# Altium PCB BUCK.PcbDoc
Units mm, origin at the board's own origin, x right, y up, seen from the top; angles counter-clockwise.
Board outline 127 x 101.6 mm, 4 copper layers (Top Layer, Internal Plane 1, Internal Plane 2, Bottom Layer), stack 0.462 mm thick; 37 components, 24 nets, 93 pads, 0 vias.
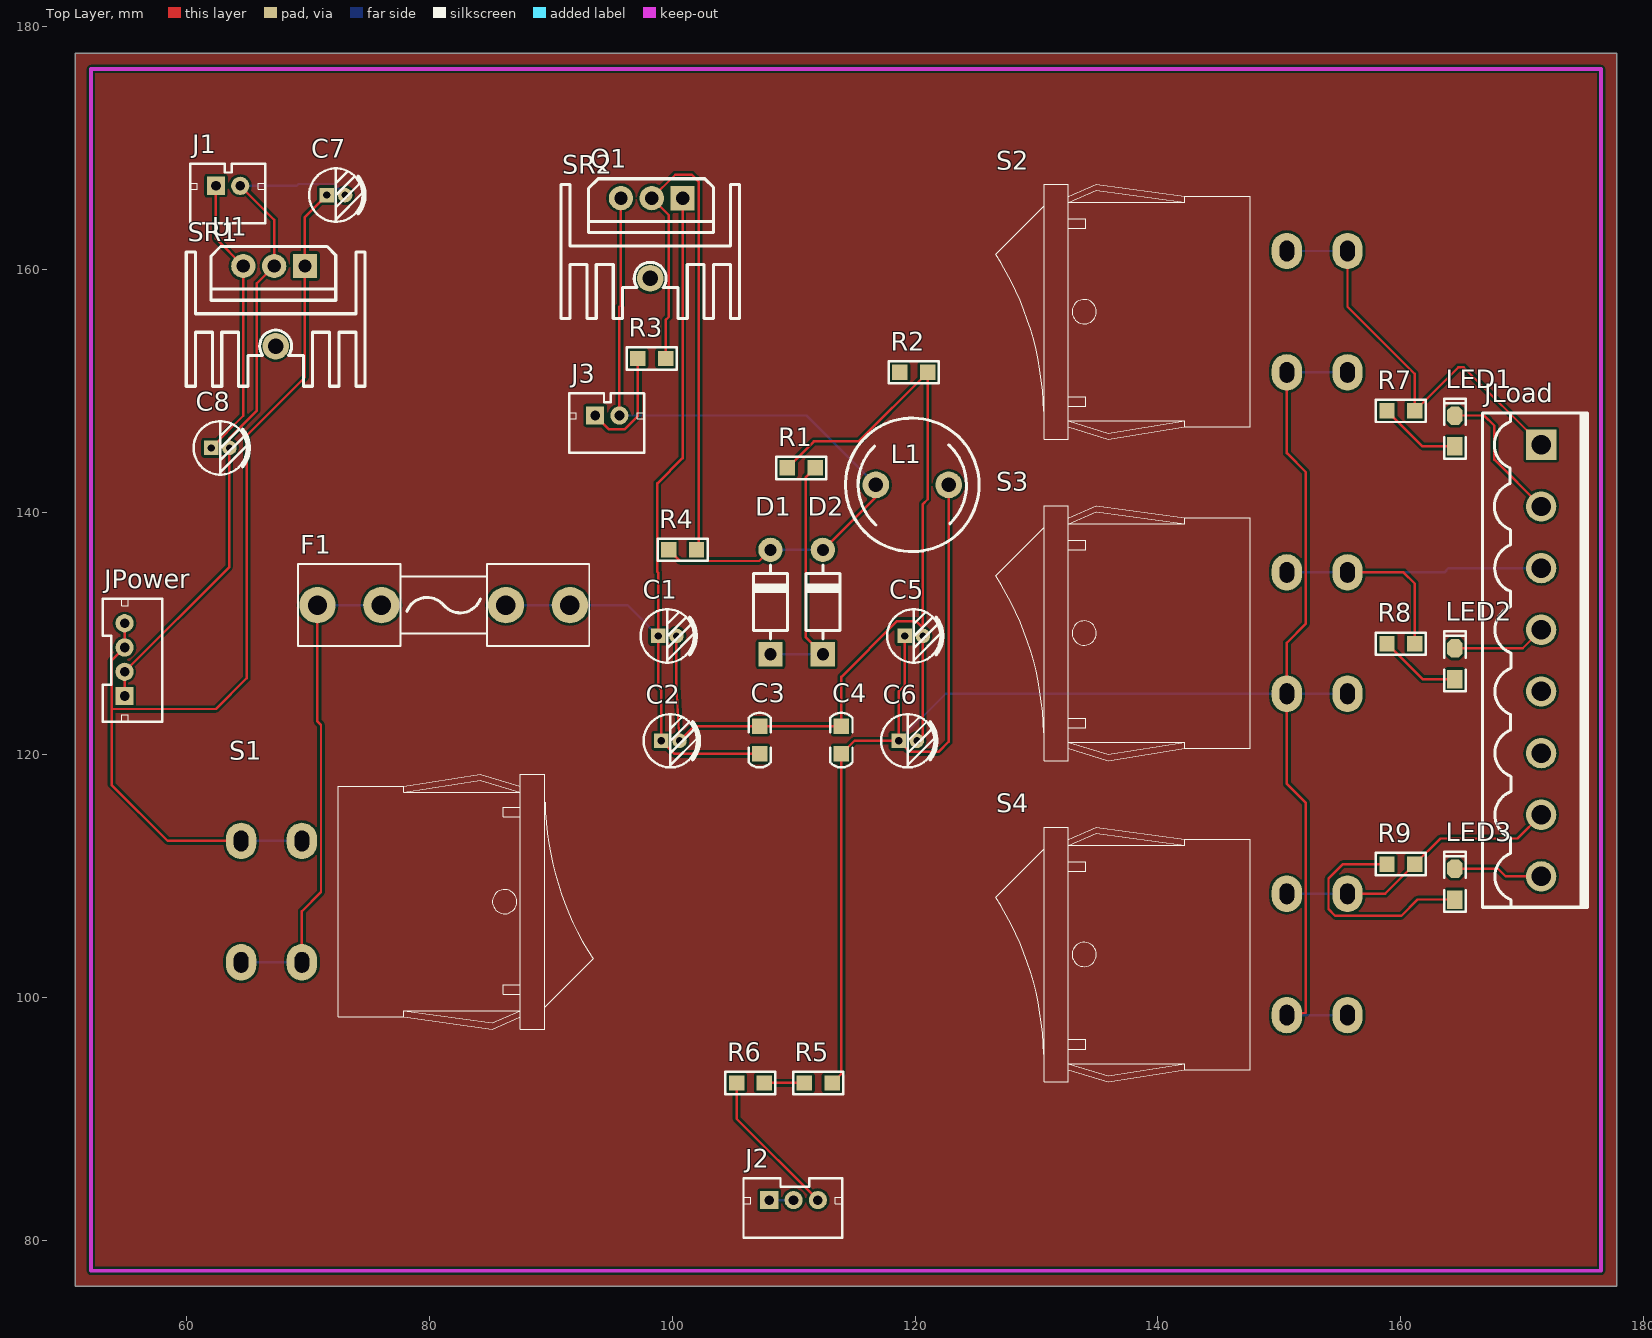
[diagram p0: Top Layer view]
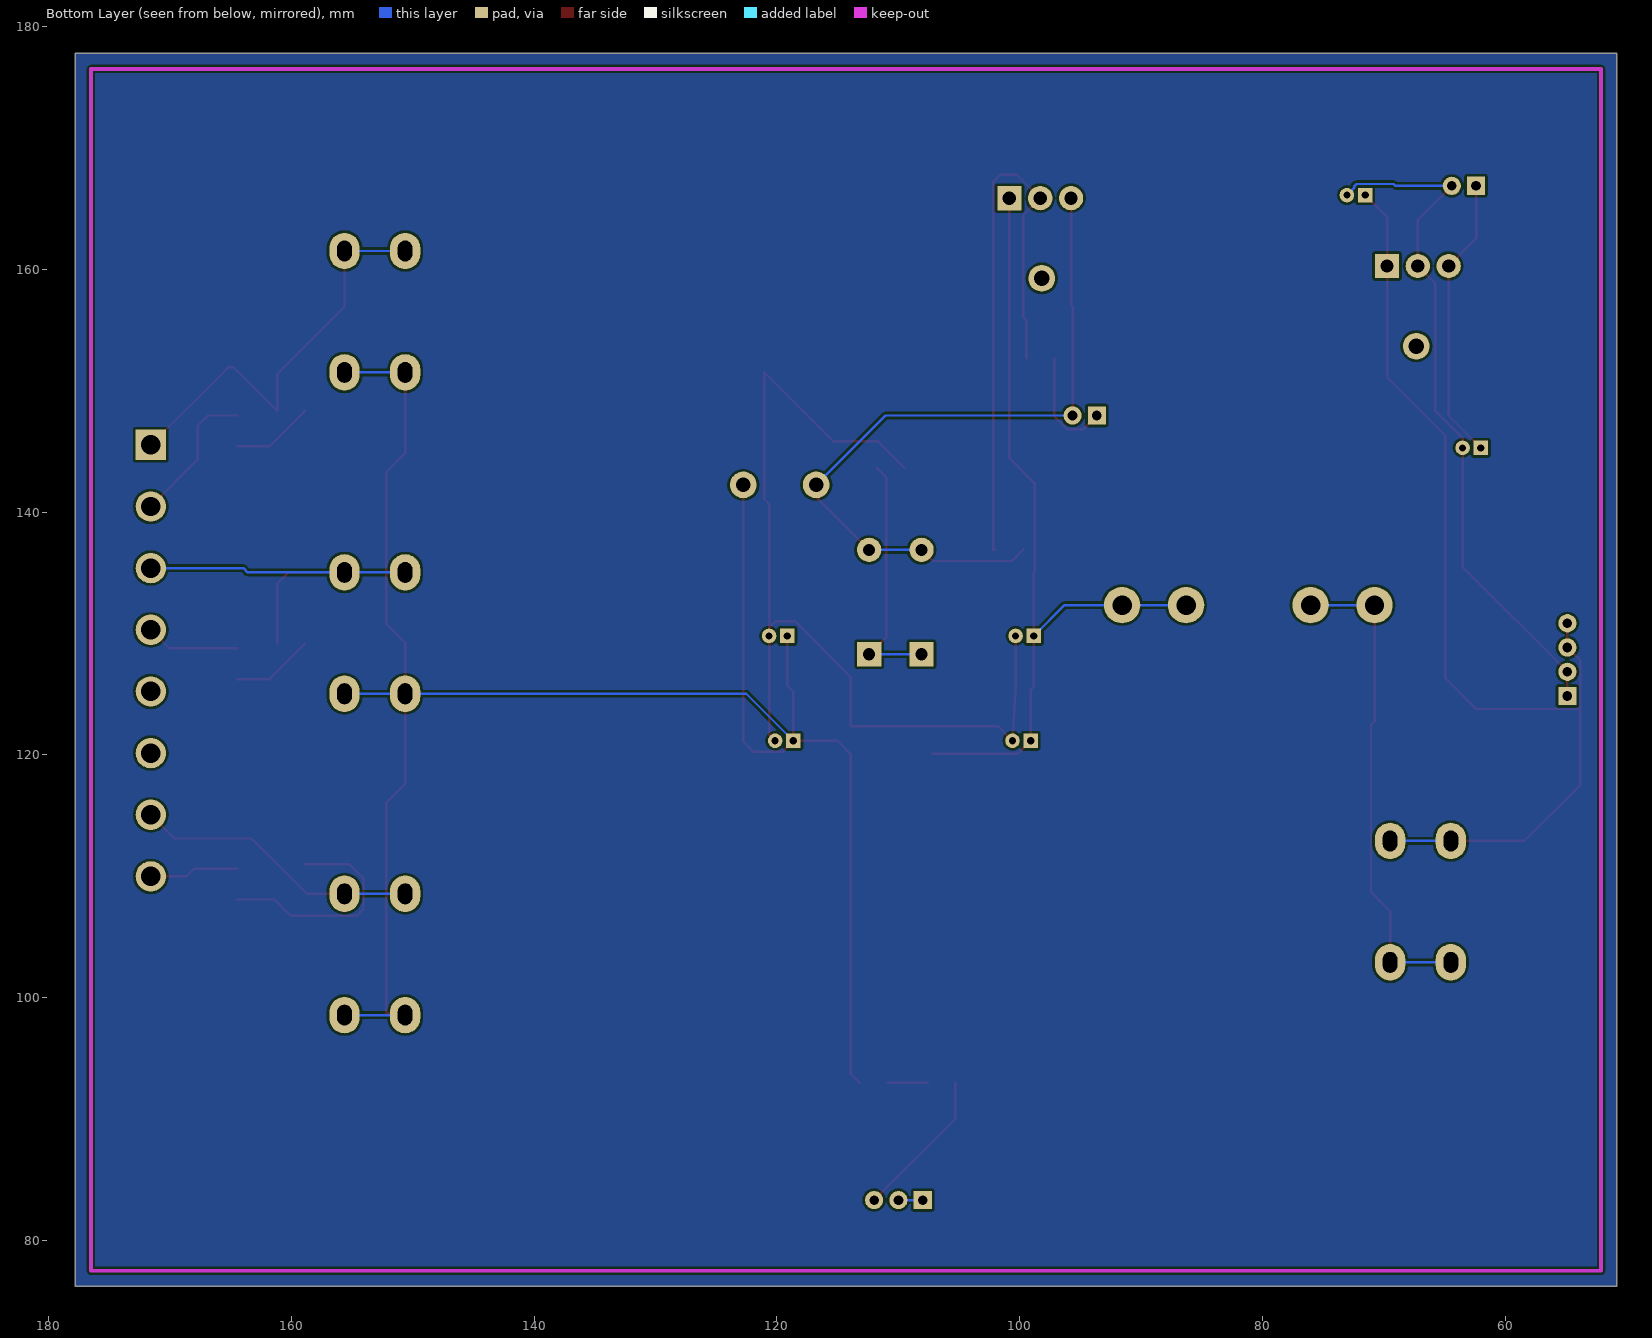
[diagram p1: Bottom Layer view, seen from below]
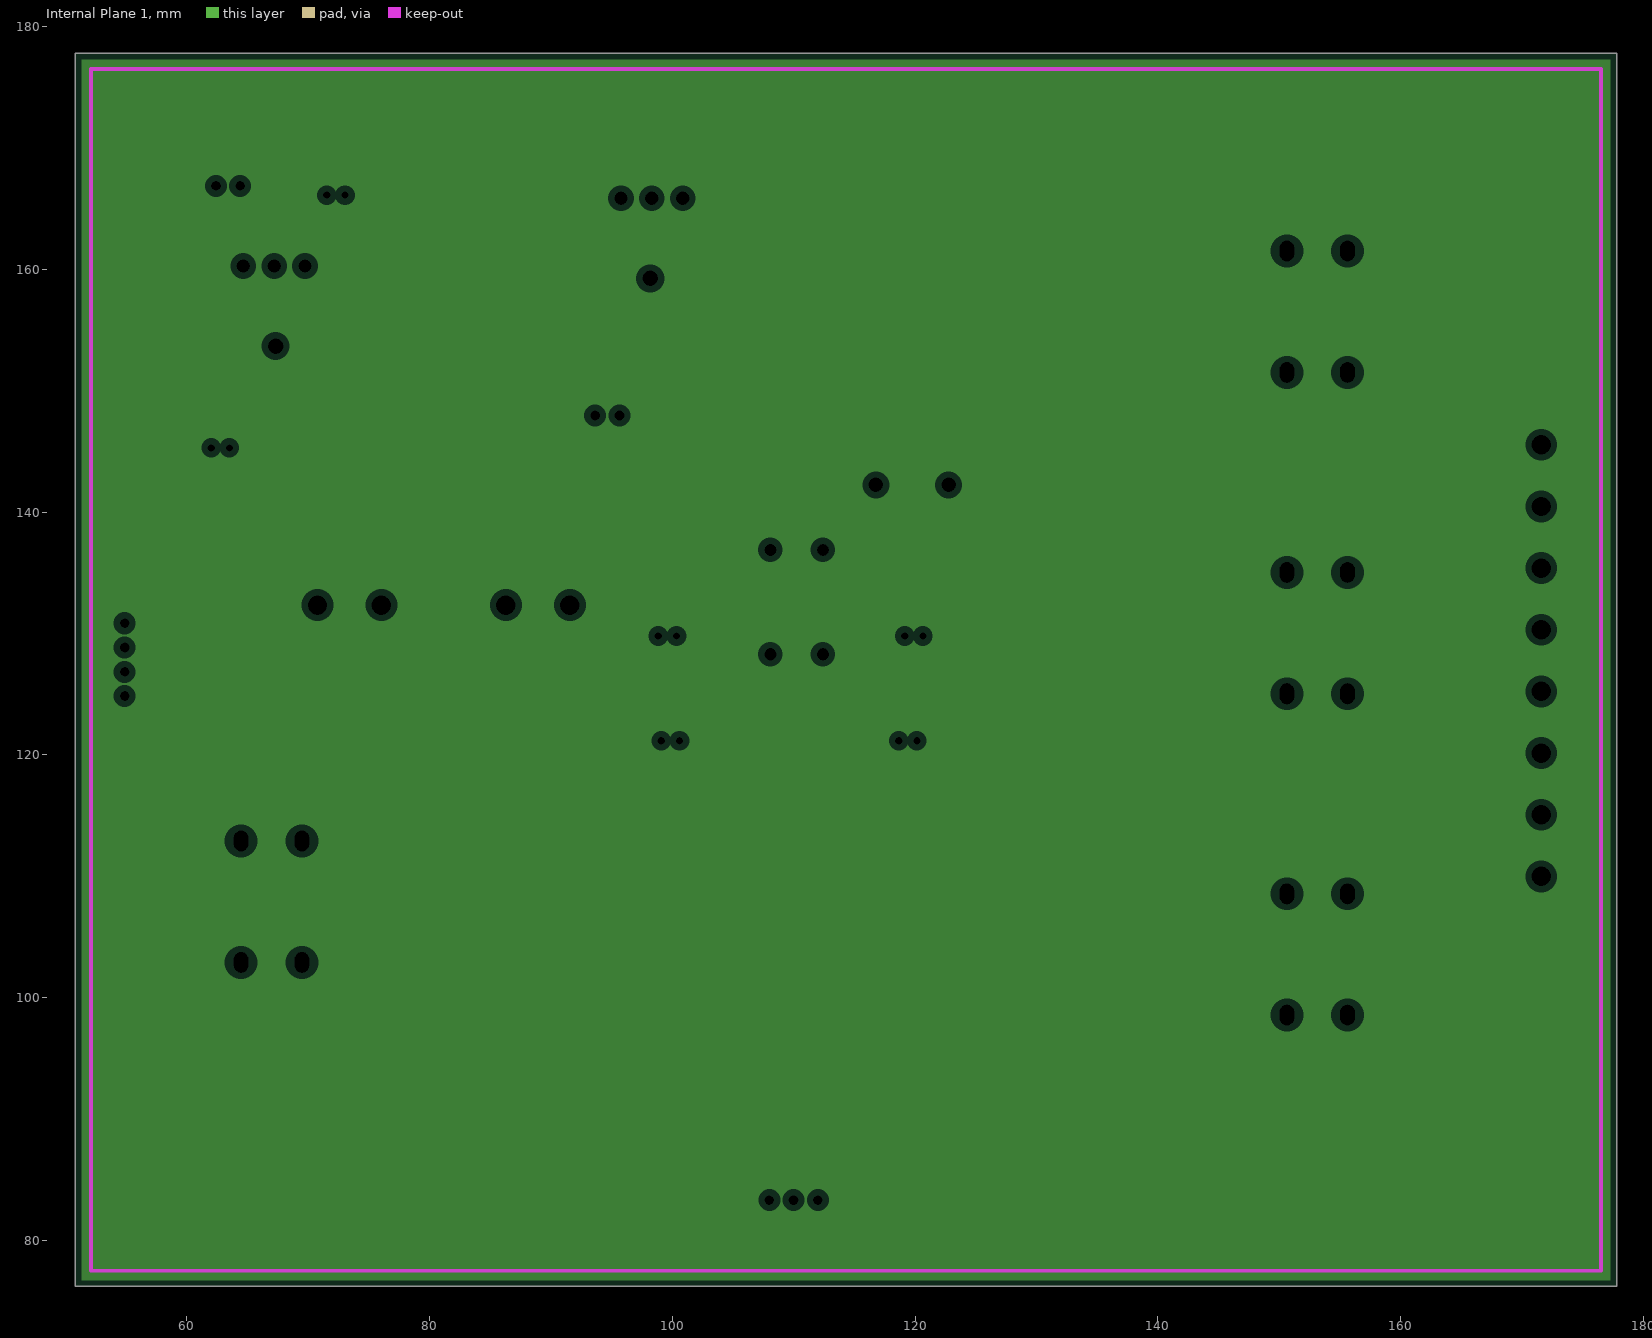
[diagram p2: Internal Plane 1, clearances drawn from the general rule]
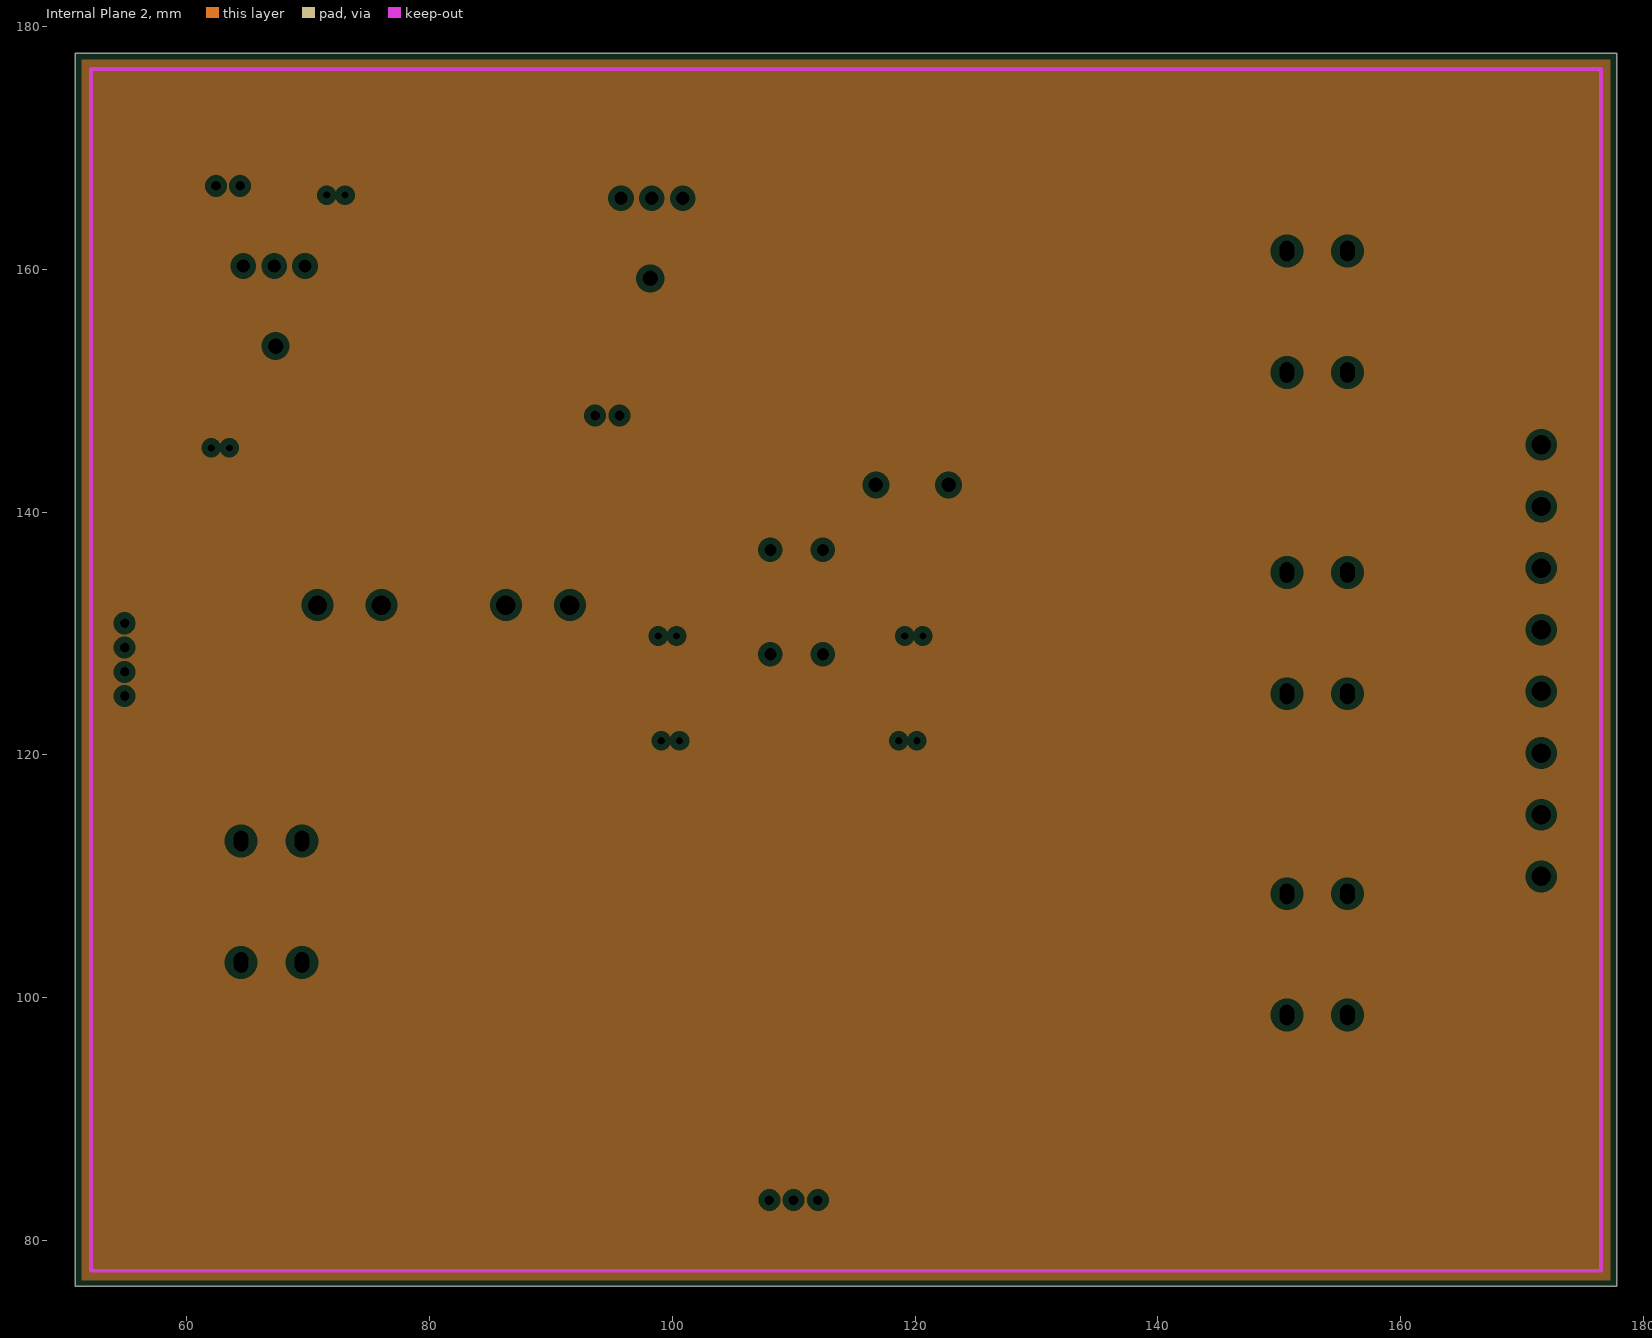
[diagram p3: Internal Plane 2, clearances drawn from the general rule]

## Layer stack, top to bottom
Top Solder: solder mask 0.0102, Solder Resist, Dk 3.5
Top Layer: signal copper 0.0356
Internal Plane 1: plane copper 0.0356
Internal Plane 2: plane copper 0.0356
Dielectric 1: dielectric 0.32, FR-4, Dk 4.8
Bottom Layer: signal copper 0.0356
Bottom Solder: solder mask 0.0102, Solder Resist, Dk 3.5

## Board outline
50.8,76.2 177.8,76.2 177.8,177.8 50.8,177.8

## Design rules (kind name [scope] priority, off if disabled: settings)
Clearance [All] p1: gap=0.2 ignorepadtopadclearanceinfootprint=FALSE
PlaneClearance [All] p1: clearance=0.508
PlaneConnect [All] p1: planeconnectstyle=Relief reliefexpansion=0.508 reliefentries=4 reliefconductorwidth=0.254 reliefairgap=0.254
PolygonConnect [All] p1: connectstyle=Relief reliefconductorwidth=0.254 reliefentries=4 polygonreliefangle="90 Angle" airgapwidth=0.254
RoutingVias [All] p1: holewidth=0.6 width=1 viastyle="Through Hole" minholewidth=0.711 minwidth=1.27 maxholewidth=0.711 maxwidth=1.27
SMDNeckDown [All] p1: percent=50.000
SolderMaskExpansion [All] p1: expansion=0.102
Width [All] p1: maxlimit=0.2 minlimit=0.2 preferedwidth=0.2
28 further rules are at their usual default settings.

## Components (designator, comment, footprint, x,y, rotation, side; value= is the part's Value field where it differs from the comment)
C1 "1000uF/63V" "CAP 1.5*4*8" 99.58,129.794 r0 top
C2 "1000uF/63V" "CAP 1.5*4*8" 99.834,121.158 r0 top
C3 "335J/100V" "C 0805" 107.188,121.215 r90 top
C4 "335J/100V" "C 0805" 113.919,121.215 r90 top
C5 "1000uF/63V" "CAP 1.5*4*8" 119.888,129.794 r0 top
C6 "4700uF/50V" "CAP 1.5*4*8" 119.392,121.158 r0 top
C7 "470uF/35V" "CAP 1.5*4*8" 72.275,166.116 r0 top
C8 "100uF/25V" "CAP 1.5*4*8" 62.75,145.288 r0 top
D1 "1N4007" DO-41G 108.077,132.588 r90 top
D2 "1N4007" DO-41G 112.395,132.588 r90 top
F1 "10A/250V" "FU 5x20" 81.153,132.334 r180 top
J1 "HDR-1X2" "PH2.0 D-L-2P" 62.389,166.878 r0 top
J2 "HDR-1X3" "PH2.0 D-L-3P" 107.982,83.312 r0 top
J3 "HDR-1X2" "PH2.0 D-L-2P" 93.631,147.955 r0 top
JLoad "HDR-1X8" KF2EDGK5.08-8P 171.577,145.542 r270 top
JPower "HDR-1X4" "PH2.0 D-L-4P" 54.864,124.841 r90 top
L1 "100uH/10A" PK1012 119.761,142.24 r0 top
LED1 "Green LED" "LED 0805G" 164.465,146.685 r90 top
LED2 "Green LED" "LED 0805G" 164.465,127.508 r90 top
LED3 "Green LED" "LED 0805G" 164.465,109.347 r90 top
Q1 "MOSFET-N" TO220A 98.298,165.862 r180 top
R1 "0.01/3W" "R 0805" 110.617,143.637 r0 top
R2 "0.01/3W" "R 0805" 119.888,151.511 r0 top
R3 "10K/0.25W" "R 0805" 98.298,152.654 r180 top
R4 "10K/0.25W" "R 0805" 100.838,136.906 r180 top
R5 "10K/4W" "R 0805" 112.014,92.964 r0 top
R6 "10K/4W" "R 0805" 106.426,92.964 r0 top
R7 "10K/0.25W" "R 0805" 160.02,148.336 r0 top
R8 "10K/0.25W" "R 0805" 160.02,129.159 r0 top
R9 "10K/0.25W" "R 0805" 160.02,110.998 r0 top
S1 "KCD2/16A/250VAC" KCD1-104-W 69.469,112.903 r180 top
S2 "KCD2/16A/250VAC" KCD1-104-W 150.622,151.511 r0 top
S3 "KCD2/16A/250VAC" KCD1-104-W 150.622,125.031 r0 top
S4 "KCD2/16A/250VAC" KCD1-104-W 150.622,98.552 r0 top
SR1 "散热片" 散热片 67.31,153.67 r0 top
SR2 "散热片" 散热片 98.171,159.258 r0 top
U1 "LT7815" TO220A 67.183,160.274 r180 top

## Footprints (in the part's own frame and the unit in brackets; to place one, negate y for a bottom-side part, rotate by r counter-clockwise, add the part's x,y. Pads: shape width x height; smd on the part's side, far side on the other; paste and mask are expansions set on the pad)
"C 0805" [mil] "无极性贴片电容"
  rect 50x50 smd: 1(-45,0) 2(45,0)
  silkscreen extent -89,-36 89,36, body extent -39,-24 39,24, height 20
"CAP 1.5*4*8" [mm] "脚距1.5mm直径4mm高度8mm"
  rect 1.2x1.2 hole 0.6: 1(-0.75,0)
  round 1.2 hole 0.6: 2(0.75,0)
  silkscreen extent -2.2,-2.2 2.41,2.2, body extent -2,-2 2.02,2, height 8.04
DO-41G [mm] "2.5*8.6mm(直径，脚距）"
  rect 2x2 hole 1: 1(-4.3,0)
  round 2 hole 1: 2(4.3,0)
  silkscreen extent -3.05,-1.4 3.05,1.4, body extent -4.7,-1.25 4.7,1.25, height 2.55
"FU 5x20" [mm] "5*20保险管底座夹子"
  round 3 hole 1.6: 1(-10.4,0) 1(-5.13,0) 2(5.13,0) 2(10.4,0)
  silkscreen extent -12,-3.38 12,3.38, body extent -10.8,-3.15 10.8,3.15, height 9.77
KCD1-104-W [mm] "船型开关-卧式"
  oval 2.5x3 hole 1.2 slot 1.7 at 90 deg mask+0: 1(0,0) 1(5,0) 2(0,10) 2(5,10)
  silkscreen extent -23.99,-5.5 -3,15.5, body extent -24.2,-5.95 5.4,15.95, height 15.1
KF2EDGK5.08-8P [mm] "直列插拔式端子"
  rect 2.5x2.5 hole 1.6: 1(0,0)
  round 2.5 hole 1.6: 2(5.08,0) 3(10.16,0) 4(15.24,0) 5(20.32,0) 6(25.4,0) 7(30.48,0) 8(35.56,0)
  silkscreen extent -2.62,-4.83 38.1,3.81, body extent -2.54,-4.75 38.1,3.75, height 11.25
"LED 0805G" [mil] "绿色0805LED"
  rect 60x50 smd: 1(-50,0)
  oct 60x50 smd: 2(50,0)
  silkscreen extent -90,-35 105,35, body extent -39,-25 39,25, height 32
"PH2.0 D-L-2P" [mm] "接插件/1A"
  rect 1.5x1.5 hole 0.8: 1(0,0)
  round 1.5 hole 0.8: 2(2,0)
  silkscreen extent -2.13,-3.08 4.06,1.82, body extent -1.95,-3 3.95,1.7, height 6.02
"PH2.0 D-L-3P" [mm] "接插件/1A"
  rect 1.5x1.5 hole 0.8: 1(0,0)
  round 1.5 hole 0.8: 2(2,0) 3(4,0)
  silkscreen extent -2.13,-3.08 6,1.82, body extent -1.95,-3 5.95,1.7, height 6.02
"PH2.0 D-L-4P" [mm] "接插件/1A"
  rect 1.5x1.5 hole 0.8: 1(0,0)
  round 1.5 hole 0.8: 2(2,0) 3(4,0) 4(6,0)
  silkscreen extent -2.13,-3.08 8.03,1.82, body extent -1.95,-3 7.95,1.7, height 6.02
PK1012 [mm] "6*11*14mm(脚距，直径，高）"
  round 2.2 hole 1.2: 1(-3,0) 2(3,0)
  silkscreen extent -5.5,-5.5 5.5,5.5, body extent -5.5,-5.5 5.5,5.5, height 14.02
"R 0805" [mil] "1/8W贴片电阻"
  rect 50x50 smd: 1(-45,0) 2(45,0)
  silkscreen extent -81,-36 81,36, body extent -39,-25 39,25, height 20
TO220A [mm] "220，3脚晶体管"
  rect 2x2 hole 1.1: 1(-2.54,0)
  round 2 hole 1.1: 2(0,0) 3(2.54,0)
  silkscreen extent -5.08,-1.6 5.21,2.82, body extent -5.15,-1.53 5.15,2.9, height 18.5
散热片 [mm]
  round 2.2 hole 1.3: 0(0,0)
  silkscreen extent -7.37,-3.3 7.37,7.75, body extent -7.39,-3.27 7.39,7.53, height 25.13

## Part data
C1 C2 C5 C6 C7 C8: library part C-CAP, "直插电解电容", BOM名称=直插电解电容, 学习资源=www.ooocke.com, 版权归属=源创客
C3 C4: library part C, "无极性贴片电容", BOM名称=无极性贴片电容, 学习资源=www.ooocke.com, 版权归属=源创客
D1 D2: "整流二极管", BOM名称=整流二极管, 学习资源=www.ooocke.com, 版权归属=源创客
F1: library part "FU 5x20", "5*20保险丝", BOM名称=5*20保险丝, 学习资源=www.ooocke.com, 版权归属=源创客
J1 J3: library part "Header 2", "2P接插件", BOM名称=2P接插件, 学习资源=www.ooocke.com, 版权归属=源创客
J2: library part "Header 3", "3P接插件", BOM名称=3P接插件, 学习资源=www.ooocke.com, 版权归属=源创客
JLoad: library part "Header 8", "8P接插件", BOM名称=8P接插件, 学习资源=www.ooocke.com, 版权归属=源创客
JPower: library part "Header 4", "4P接插件", BOM名称=4P接插件, 学习资源=www.ooocke.com, 版权归属=源创客
L1: library part L, "小功率贴片电感", BOM名称=小功率贴片电感, 学习资源=www.ooocke.com, 版权归属=源创客
LED1 LED2 LED3: library part LED-SMD, "贴片LED", BOM名称=贴片LED, 学习资源=www.ooocke.com, 版权归属=源创客
Q1: "N-Channel MOSFET", LatestRevisionDate=17-Jul-2002, LatestRevisionNote="Re-released for DXP Platform.", PackageDescription="TO, Flat Index; 3 In-Line, Axial Leads; Body Dia. 4.6mm; Lead Dia. 0.5 mm (max)", PackageReference=E3, PackageVersion=1995/1996, Published=8-Jun-2000, Publisher="Altium Limited"
R1 R2 R3 R4 R5 R6 R7 R8 R9: library part R, "贴片电阻", BOM名称=贴片电阻, 学习资源=www.ooocke.com, 版权归属=源创客
SR1 SR2: library part S1, BOM名称=散热片, 学习资源=www.ooocke.com, 版权归属=源创客

## Nets (pads, with @x,y where several pads share a name; then routed paths per layer and width w, separated by ;. In a path a pad name is that pad's centre, name@x,y a point inside that pad or via, vN(x,y) a via of type N, cw(c..) or ccw(c..) an arc to the next point about the centre after c; other vN are vias at no path point)
0V: C7.2 C8.2 J1.2 JPower.1 JPower.2 U1.2 | length 57.4
  Top Layer w0.2: JPower.1 JPower.2 63.5,135.477 C8.2 63.5,146.101 65.761,148.361 65.761,158.852 U1.2 67.183,164.084 J1.2
  Bottom Layer w0.2: J1.2 69.037,166.878 69.19,167.03 72.238,167.03 72.441,166.827 72.441,166.7 C7.2
24V: C7.1 JPower.3 JPower.4 S1.1 U1.1 | length 86.1
  Top Layer w0.2: JPower.4 JPower.3 53.797,127.774 53.797,123.774 ; S1.1@64.469,112.903 58.42,112.903 53.797,117.526 53.797,123.774 ; C7.1 69.723,164.314 U1.1 69.723,151.105 64.922,146.304 64.922,126.314 62.382,123.774 53.797,123.774
  Bottom Layer w0.2: S1.1@64.469,112.903 S1.1@69.469,112.903
+15V: C8.1 J1.1 U1.3 | length 23.6
  Top Layer w0.2: C8.1 64.643,147.931 U1.3 62.389,162.528 J1.1
GND: J2.1 J2.2 | length 2
  Bottom Layer w0.2: J2.1 J2.2
NetC1_1: C1.1 C2.1 C3.1 F1.1 Q1.1 | length 67.9
  Top Layer w0.2: Q1.1 100.838,144.45 98.755,142.367 98.755,135.076 98.83,135.001 C1.1 98.83,125.603 99.084,125.349 C2.1 100.17,120.072 C3.1
  Bottom Layer w0.2: F1.1@86.283,132.334 91.553,132.334 96.29,132.334 C1.1
NetC1_2: C1.2 C2.2 C3.2 C4.2 C5.2 C6.2 R1.1 R2.2 | length 80.9
  Top Layer w0.2: C1.2 100.33,125.73 C2.2 101.784,122.358 C3.2 C4.2 113.919,126.416 118.516,131.013 120.079,131.013 120.638,130.454 ; R1.1 111.658,145.821 115.341,145.821 R2.2 121.031,141.058 120.638,140.665 120.638,130.454 ; C6.2 120.638,121.654 C5.2 120.638,130.454
NetC4_1: C4.1 C5.1 C6.1 L1.2 R5.2 S2.1 S3.1 S4.1 | length 172.3
  Top Layer w0.2: R5.2 113.919,93.726 C4.1 115.005,121.158 C6.1 ; C5.1 119.138,125.718 118.642,125.222 C6.1 ; L1.2 122.761,121.085 121.92,120.244 119.556,120.244 C6.1 ; S4.1@150.622,98.552 152.197,98.755 152.197,116.027 150.622,117.602 150.622,125.031 150.622,129.235 152.197,130.81 152.197,143.281 150.622,144.856 S2.1@150.622,151.511
  Bottom Layer w0.2: C6.1 122.515,125.031 150.622,125.031 S3.1@155.622,125.031 ; S4.1@150.622,98.552 S4.1@155.622,98.552 ; S2.1@150.622,151.511 S2.1@155.622,151.511
NetD1_1: D1.1 D2.1 R1.2 | length 20.6
  Top Layer w0.2: R1.2 110.973,142.85 110.973,129.71 D2.1
  Bottom Layer w0.2: D1.1 D2.1
NetF1_2: F1.2 S1.2 | length 40.5
  Top Layer w0.2: S1.2@69.469,102.903 69.469,107.112 71.044,108.687 71.044,122.453 70.753,122.744 F1.2@70.753,132.334
  Bottom Layer w0.2: S1.2@64.469,102.903 S1.2@69.469,102.903 ; F1.2@70.753,132.334 F1.2@76.023,132.334
NetJLoad_1: JLoad.1 R7.2 S2.2 | length 35
  Top Layer w0.2: S2.2@155.622,161.511 155.622,156.921 161.163,151.38 R7.2 164.744,151.917 165.202,151.917 JLoad.1
  Bottom Layer w0.2: S2.2@150.622,161.511 S2.2@155.622,161.511
NetJLoad_2: JLoad.2 LED1.2 | length 11.9
  Top Layer w0.2: LED1.2 166.878,147.955 167.716,147.117 167.716,144.323 JLoad.2
NetJLoad_3: JLoad.3 R8.2 S3.2 | length 32
  Top Layer w0.2: S3.2@155.622,135.031 160.244,135.031 161.163,134.112 R8.2
  Bottom Layer w0.2: S3.2@150.622,135.031 155.622,135.031 163.601,135.031 163.952,135.382 JLoad.3
NetJLoad_4: JLoad.4 LED2.2 | length 7.7
  Top Layer w0.2: LED2.2 170.053,128.778 JLoad.4
NetJLoad_7: JLoad.7 R9.2 S4.2 | length 23.7
  Top Layer w0.2: S4.2@155.622,108.552 158.717,108.552 R9.2 163.271,113.106 169.621,113.106 JLoad.7
  Bottom Layer w0.2: S4.2@150.622,108.552 S4.2@155.622,108.552
NetJLoad_8: JLoad.8 LED3.2 | length 7.4
  Top Layer w0.2: LED3.2 168.021,110.617 168.656,109.982 JLoad.8
NetLED1_1: LED1.1 R7.1 | length 6.8
  Top Layer w0.2: R7.1 161.798,145.415 LED1.1
NetLED2_1: LED2.1 R8.1 | length 6.8
  Top Layer w0.2: R8.1 161.798,126.238 LED2.1
NetLED3_1: LED3.1 R9.1 | length 19
  Top Layer w0.2: R9.1 155.245,110.998 154.051,109.804 154.051,107.29 154.61,106.731 160.045,106.731 161.392,108.077 LED3.1
NetQ1_2: Q1.2 R3.1 R4.1 | length 49.3
  Top Layer w0.2: R3.1 99.441,155.829 99.695,156.083 99.695,164.465 Q1.2 100.228,167.792 101.6,167.792 102.159,167.234 102.159,136.906 R4.1
NetR2_1: R2.1
NetR5_1: R5.1 R6.2 | length 3.3
  Top Layer w0.2: R6.2 R5.1
S1_G: J3.1 R3.2 | length 9.2
  Top Layer w0.2: J3.1 94.774,146.812 96.037,146.812 97.155,147.93 R3.2
S1_S: D1.2 D2.2 J3.2 L1.1 Q1.3 R4.2 | length 62.1
  Top Layer w0.2: J3.2 95.631,156.921 95.758,157.048 Q1.3 ; R4.2 100.635,135.966 107.155,135.966 D1.2 ; D2.2 116.761,141.254 L1.1
  Bottom Layer w0.2: J3.2 111.046,147.955 L1.1 ; D1.2 D2.2
Vf: J2.3 R6.1 | length 12.4
  Top Layer w0.2: R6.1 105.283,90.011 J2.3
pads on no net: JLoad.5 JLoad.6 SR1.0 SR2.0

## Polygon pours and split planes (outlines as drawn)
no net on Top Layer "Top Layer-No Net" (solid, pour order 0): 50.8,177.8 50.8,76.2 177.8,76.2 177.8,177.8
no net on Bottom Layer "Top Layer-No Net" (solid, pour order 2): 50.8,177.8 50.8,76.2 177.8,76.2 177.8,177.8

## Keep-outs
Keep-Out Layer:
  lines w0.3: 52.1,77.5 176.5,77.5 176.5,176.5 52.1,176.5 52.1,77.5

## Dimensions
52.1,77.5 to 176.5,77.5 on Mechanical 1
52.1,77.5 to 52.1,176.5 on Mechanical 1